# Altium PCB Basic_flex_IMU.PcbDoc
Units mm, origin at the board's own origin, x right, y up, seen from the top; angles counter-clockwise.
Board outline 23.11 x 11.56 mm, 2 copper layers (Top Layer, Bottom Layer); 12 components, 17 nets, 69 pads, 18 vias.
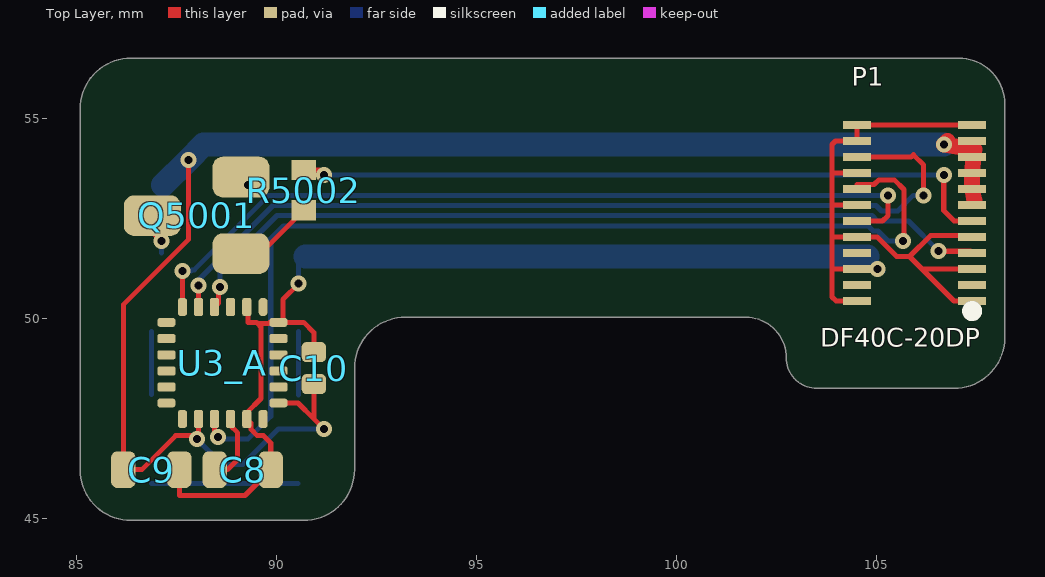
[diagram p0: Top Layer view]
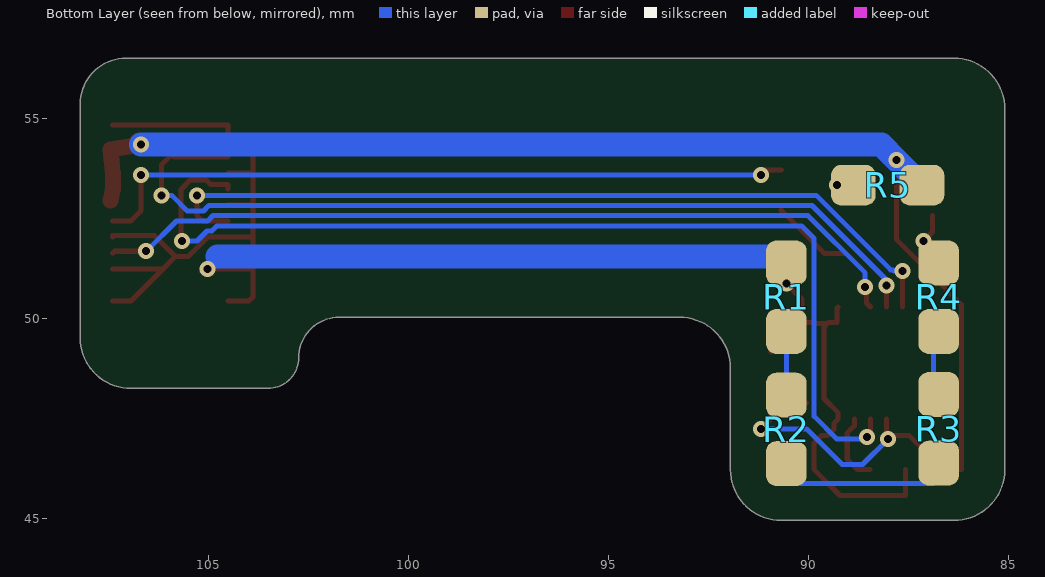
[diagram p1: Bottom Layer view, seen from below]
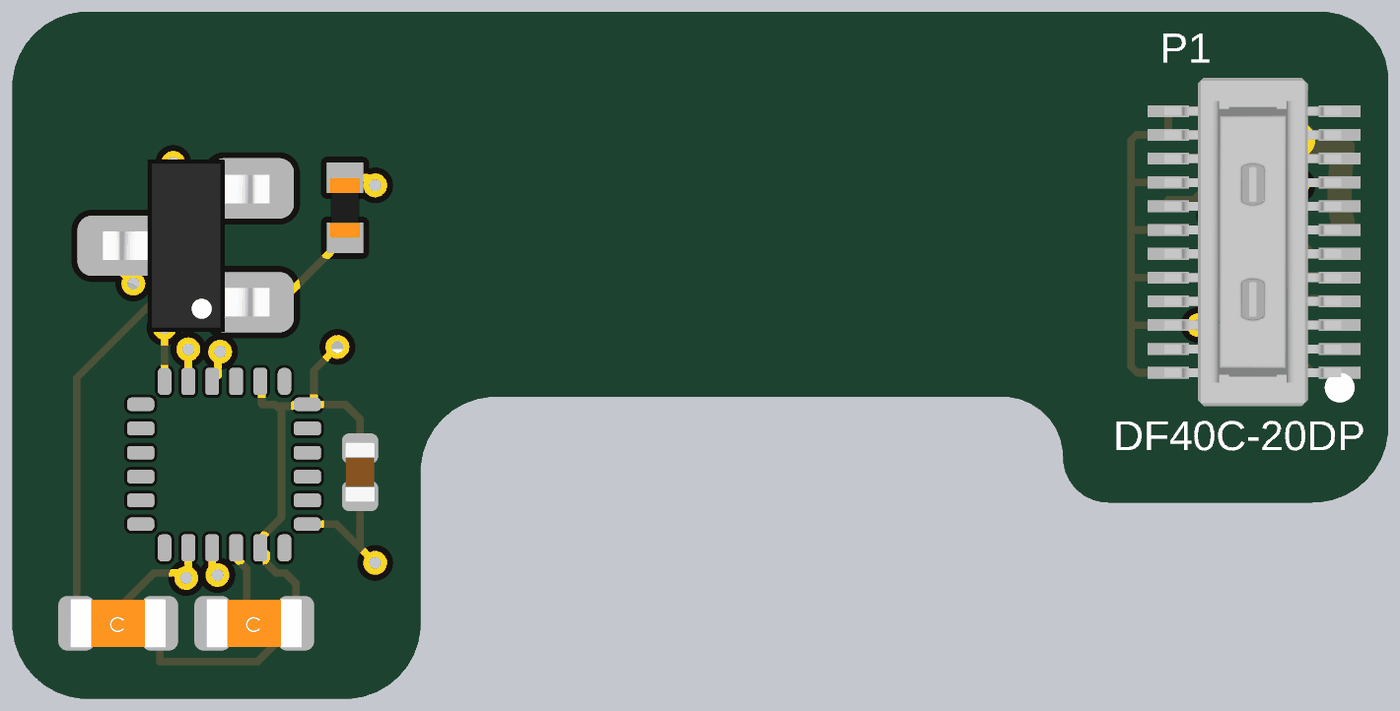
[diagram p2: 3D render of the assembled board from above, using the file's embedded part models]
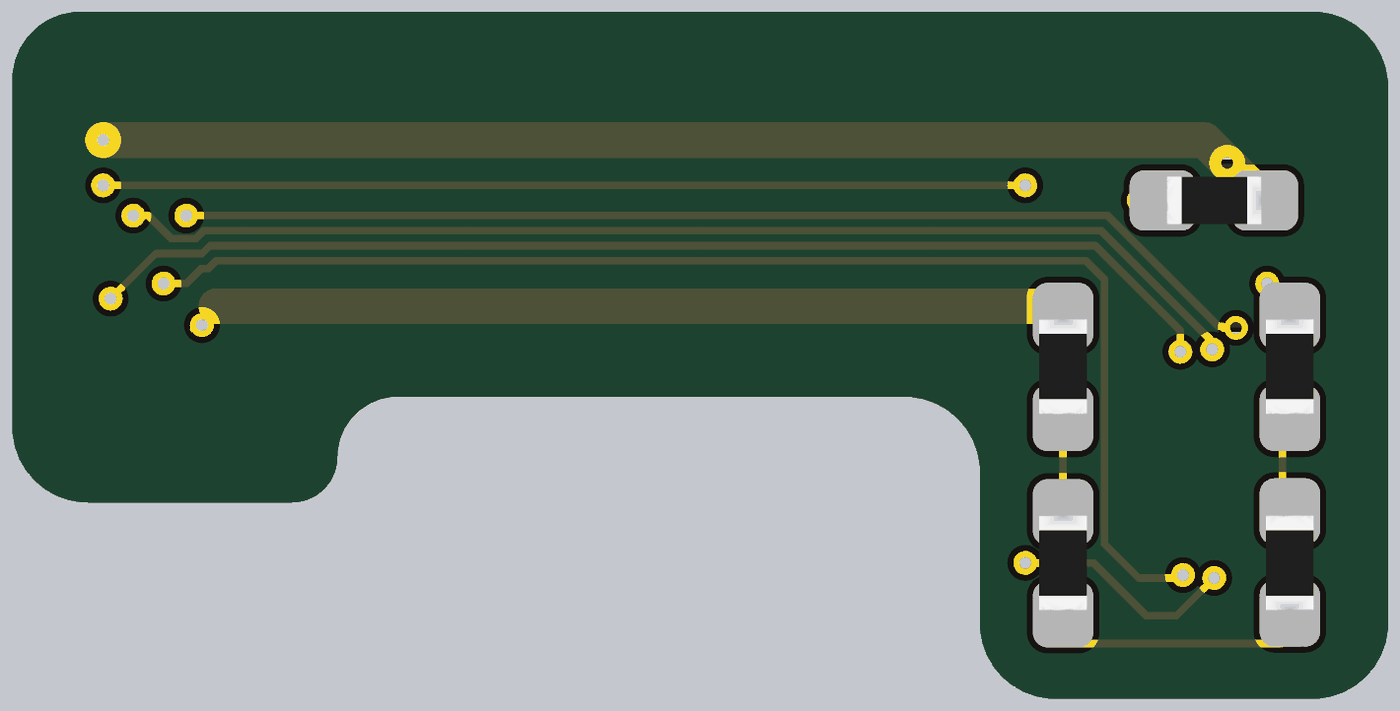
[diagram p3: 3D render of the assembled board from below, using the file's embedded part models]

## Layer stack, top to bottom
Top Solder: solder mask 0.0102, Solder Resist, Dk 3.5
Top Layer: signal copper 0.0356
Dielectric 1: dielectric 0.32, FR-4, Dk 4.8
Bottom Layer: signal copper 0.0356
Bottom Solder: solder mask 0.0102, Solder Resist, Dk 3.5

## Board outline
85.09,46.228 ccw(c86.36,46.228) 86.36,44.958 90.678,44.958 ccw(c90.678,46.228) 91.948,46.228 91.948,48.768 cw(c93.218,48.768) 93.218,50.038 101.727,50.038 cw(c101.727,49.022) 102.743,49.022 ccw(c103.505,49.022) 103.505,48.26 106.934,48.26 ccw(c106.934,49.53) 108.204,49.53 108.204,55.372 ccw(c107.061,55.372) 107.061,56.515 86.36,56.515 ccw(c86.36,55.245) 85.09,55.245

## Design rules (kind name [scope] priority, off if disabled: settings)
Clearance [All] p1: gap=0.125
PolygonConnect [All] p1: connectstyle=Relief reliefconductorwidth=0.254 reliefentries=4 polygonreliefangle="90 Angle" airgapwidth=0.254
RoutingVias [All] p1: holewidth=0.2 width=0.2 viastyle="Through Hole" minholewidth=0.2 minwidth=0.4 maxholewidth=0.711 maxwidth=1.27
SolderMaskExpansion [All] p1: expansion=0.102
Width [All] p1: maxlimit=0.6 minlimit=0.127 preferedwidth=0.127
30 further rules are at their usual default settings.

## Components (designator, comment, footprint, x,y, rotation, side; value= is the part's Value field where it differs from the comment)
C8 "2u2" 0603-CAP 89.154,46.228 r0 top
C9 "2u2" 0603-CAP 86.868,46.228 r0 top
C10 "0u1" 0402-CAP 90.932,48.768 r90 top
P1 "DF40C-20DP" DF40C-20-DP 105.946,52.643 r180 top locked
Q5001 "MMBT3906*SMD" SOT23-BEC 88.011,52.578 r90 top
R1 "Resistor" R0603 90.551,50.546 r270 bottom
R2 "Resistor" R0603 90.551,47.244 r270 bottom
R3 "Resistor" R0603 86.741,47.244 r90 bottom
R4 "Resistor" R0603 86.741,50.546 r270 bottom
R5 "Resistor" R0603 88.011,53.34 r0 bottom
R5002 "1K8" 0402-RES 90.678,53.213 r90 top
U3_A "MPU-9250" MPU-9250 88.646,48.895 r0 top

## Footprints (in the part's own frame and the unit in brackets; to place one, negate y for a bottom-side part, rotate by r counter-clockwise, add the part's x,y. Pads: shape width x height; smd on the part's side, far side on the other; paste and mask are expansions set on the pad)
0402-CAP [mil]
  rrect50% 20x24 smd mask+0: P$1(-15.75,0) P$2(15.75,0)
  body extent -20,-10 20,10, height 20
0402-RES [mil] "0402-RES"
  rect 20x24 smd: P$1(-19.69,0) P$2(20,0)
  body extent -20,-10 20,10, height 20
0603-CAP [mil] "0603-CAP"
  rrect50% 24x36 smd mask+0: P$1(-27.56,0) P$2(27.56,0)
  body extent -31,-16 31,16, height 34
DF40C-20-DP [mm]
  rect 0.7x0.2 smd mask+0: 1(-1.444,1.8) 2(1.436,1.8) 3(-1.444,1.4) 4(1.436,1.4) 5(-1.444,1) 6(1.436,1) 7(-1.444,0.6) 8(1.436,0.6) 9(-1.444,0.2) 10(1.436,0.2) 11(-1.444,-0.2) 12(1.436,-0.2) 13(-1.444,-0.6) 14(1.436,-0.6) 15(-1.444,-1) 16(1.436,-1) 17(-1.444,-1.4) 18(1.436,-1.4) 19(-1.444,-1.8) 20(1.436,-1.8) 21(-1.444,-2.2) 22(1.436,-2.2) 23(-1.444,2.2) 24(1.436,2.2)
  silkscreen extent -1.57,2.33 -1.32,2.57, body extent -1.47,-2.76 1.5,2.76, height 1.09
MPU-9250 [mm] "MPU-9250"
  rrect70% 0.457x0.229 smd mask+0.05: 1(-1.4,1.016) 6(-1.4,-1) 13(1.4,-1) 18(1.4,1.016)
  rrect50% 0.457x0.229 smd mask+0.05: 2(-1.4,0.61) 3(-1.4,0.203) 4(-1.4,-0.2) 5(-1.4,-0.6) 14(1.4,-0.6) 15(1.4,-0.2) 16(1.4,0.203) 17(1.4,0.61)
  rrect70% 0.229x0.457 smd mask+0.05: 7(-1,-1.4) 12(1.016,-1.4) 24(-1,1.4)
  rrect50% 0.229x0.457 smd mask+0.05: 8(-0.6,-1.4) 9(-0.2,-1.4) 10(0.203,-1.4) 11(0.61,-1.4) 20(0.61,1.4) 21(0.203,1.4) 22(-0.2,1.4) 23(-0.6,1.4)
  rrect90% 0.229x0.457 smd mask+0.05: 19(1.016,1.4)
R0603 [mil]
  rrect50% 44x40 smd: 1(-33.46,0) 2(34,0)
  body extent -31,-16 32,16, height 18
SOT23-BEC [mil] "SOT23-BEC"
  rrect50% 40x56 smd: B(-37.4,-43.31) C(0,44) E(38,-43.31)
  body extent -57,-55 57,55, height 51

## Part data
C8 C9: library part CAPACITOR-0603, "Capacitor, 2.2uF, 16V, 10%, X6S, 0603, Ceramic"
C10: library part CAPACITOR-0402, "Capacitor, 0.1uF, 16V, Y5V, 0402, Ceramic"
P1: "Connector, HDR, 20Pos, 0.4mm, SMD, GOLD"
Q5001: "TRANSISTOR SWITCHING PNP SOT-23"
R1 R2 R3 R4 R5: "RES SMD 5.1 OHM 5% 1/4W 0603"
R5002: library part RESISTOR0402-RES, "RES 1.8K OHM 1/16W 1% 0402"
U3_A: library part MPU-6500

## Via types
v1: diameter 0.4, hole 0.2, Top Layer to Bottom Layer, 18 vias

## Nets (pads, with @x,y where several pads share a name; then routed paths per layer and width w, separated by ;. In a path a pad name is that pad's centre, name@x,y a point inside that pad or via, vN(x,y) a via of type N, cw(c..) or ccw(c..) an arc to the next point about the centre after c; other vN are vias at no path point)
+3V3: C9.P$1 C10.P$1 P1.11 P1.13 P1.15 P1.17 P1.19 R5.1 U3_A.8 U3_A.13 | length 39.3
  Top Layer w0.127: v1(87.793,53.972) 87.793,51.979 86.168,50.354 C9.P$1 86.629,46.228 87.479,47.078 v1@87.949,47.078 ; v1(88.011,46.99) 88.046,47.025 U3_A.8 ; U3_A.13 90.535,47.895 90.932,47.498 ; C10.P$1 90.932,47.498 ; v1(91.186,47.244) 90.932,47.498
  Top Layer w0.4: v1@106.767,54.443 v1(106.68,54.356) 107.442,54.229 P1.15 P1.13 107.442,52.959
  Bottom Layer w0.127: v1(88.011,46.99) 88.646,46.355 89.154,46.355 90.043,47.244 v1(91.186,47.244)
  Bottom Layer w0.6: R5.1 v1(87.793,53.972) 88.177,54.356 v1(106.68,54.356)
A\C\C\E\L\_\M\A\G\_\C\S\: P1.2
B\A\R\O\_\C\S\: P1.1
G\Y\R\O\_\C\S\: P1.6
GND: C8.P$2 C9.P$2 C10.P$2 P1.3 P1.4 P1.7 P1.8 P1.12 P1.16 P1.20 P1.21 P1.22 P1.23 P1.24 R1.1 U3_A.11 U3_A.18 U3_A.20 | length 44.4
  Top Layer w0.127: C9.P$2 87.568,45.582 89.208,45.582 C8.P$2 89.854,46.897 89.673,47.078 89.516,47.078 89.359,47.235 89.359,47.391 U3_A.11 89.256,47.651 89.61,48.006 89.61,49.797 89.53,49.878 ; U3_A.20 89.281,50.27 89.281,49.911 89.497,49.911 89.53,49.878 ; U3_A.18@90.157,50 90.157,50.482 v1(90.551,50.876) ; C10.P$2 90.932,49.657 90.678,49.911 U3_A.18 89.827,49.911 89.794,49.878 89.53,49.878 ; 103.897,52.843 P1.12 ; 103.913,52.043 P1.8 105.015,52.043 105.503,51.554 105.825,51.554 ; 103.948,51.243 P1.4 v1(105.019,51.243) ; 103.964,53.643 P1.16 ; P1.24 103.989,50.443 103.886,50.546 103.886,54.356 103.973,54.443 P1.20 P1.22 P1.21 ; P1.23 106.936,50.443 106.136,51.243 ; P1.3 106.136,51.243 ; P1.7 107.39,52.078 106.348,52.078 105.825,51.554 ; 105.825,51.554 106.136,51.243
  Bottom Layer w0.127: v1(90.551,50.876) R1.1 R1.1@90.717,51.562 ; 104.775,51.562 105.156,51.181 105.081,51.181 v1(105.019,51.243)
  Bottom Layer w0.6: R1.1@90.717,51.562 104.775,51.562
IMU_MISO: P1.14 U3_A.9 | length 25.3
  Top Layer w0.127: U3_A.9 88.446,47.129 v1(88.536,47.039) ; P1.14 104.51,53.354 104.938,53.354 105.058,53.475 105.444,53.475 105.685,53.234 105.685,51.964 v1(105.664,51.943)
  Bottom Layer w0.127: v1(88.536,47.039) 88.585,46.99 89.281,46.99 89.854,47.563 89.854,52.008 90.17,52.324 104.783,52.324 104.913,52.193 105.033,52.193 105.283,51.943 v1(105.664,51.943)
IMU_MOSI: P1.10 U3_A.24 | length 20.7
  Top Layer w0.127: U3_A.24 v1(87.646,51.197) ; P1.10 105.148,52.443 105.283,52.578 v1(105.283,53.086)
  Bottom Layer w0.127: v1(87.646,51.197) 87.859,51.197 87.885,51.224 87.943,51.224 89.805,53.086 v1(105.283,53.086)
IMU_SCK: P1.18 U3_A.23 | length 22.3
  Top Layer w0.127: U3_A.23 v1(88.046,50.835) ; P1.18 105.859,54.043 105.918,54.102 106.172,53.848 v1(106.172,53.086)
  Bottom Layer w0.127: v1(88.046,50.835) 88.046,50.97 89.908,52.832 104.988,52.832 105.122,52.697 105.529,52.697 105.918,53.086 v1(106.172,53.086)
IMU_TEMPERATURE_CONTROL: P1.9 R5002.P$2 | length 17.8
  Top Layer w0.127: R5002.P$2 91.059,53.721 v1(91.186,53.594) ; v1(106.68,53.594) 106.68,52.705 106.942,52.443 P1.9
  Bottom Layer w0.127: v1(91.186,53.594) v1(106.68,53.594)
M\P\U\_\C\S\: P1.5 U3_A.22 | length 20.7
  Top Layer w0.127: U3_A.22 88.546,50.395 88.546,50.761 v1(88.58,50.795) ; v1(106.553,51.689) 107.344,51.689 P1.5
  Bottom Layer w0.127: v1(88.58,50.795) 88.58,51.148 90.012,52.58 104.883,52.58 105.018,52.445 105.797,52.445 v1(106.553,51.689)
NetQ5001_B: Q5001.B R5002.P$1 | length 2
  Top Layer w0.127: Q5001.B 89.593,51.628 R5002.P$1
NetQ5001_C: Q5001.C R4.1 | length 1
  Top Layer w0.127: Q5001.C 86.893,52.172 v1(87.122,51.943)
  Bottom Layer w0.127: R4.1@87.122,51.65 v1(87.122,51.943)
NetQ5001_E: Q5001.E R5.2 | length 0.4
  Bottom Layer w0.127: R5.2 v1(89.281,53.34)
NetR1_2: R1.2 R2.1 | length 1.6
  Bottom Layer w0.127: R2.1 R1.2
NetR2_2: R2.2 R3.1 | length 3.7
  Bottom Layer w0.127: R3.1@86.868,45.886 R2.2@90.537,45.886
NetR3_2: R3.2 R4.2 | length 1.6
  Bottom Layer w0.127: R3.2@86.868,48.108 R4.2@86.868,49.682
REGOUT: C8.P$1 U3_A.10 | length 1.8
  Top Layer w0.127: C8.P$1 88.773,46.228 89.027,46.482 89.027,47.148 88.849,47.325 U3_A.10
pads on no net: U3_A.1 U3_A.2 U3_A.3 U3_A.4 U3_A.5 U3_A.6 U3_A.7 U3_A.12 U3_A.14 U3_A.15 U3_A.16 U3_A.17 U3_A.19 U3_A.21

## Silkscreen, mask and mechanical layers (free items; w line width, h text height)
Mechanical 1:
  lines w0.254: 85.09,46.228 ccw(c86.36,46.228) 86.36,44.958 90.678,44.958 ccw(c90.678,46.228) 91.948,46.228 91.948,48.768 cw(c93.218,48.768) 93.218,50.038 101.727,50.038 cw(c101.727,49.022) 102.743,49.022 ccw(c103.505,49.022) 103.505,48.26 106.934,48.26 ccw(c106.934,49.53) 108.204,49.53 108.204,54.991 108.204,55.372 ccw(c107.061,55.372) 107.061,56.515 86.36,56.515 ccw(c86.36,55.245) 85.09,55.245 85.09,46.228

## Text inside footprints (layer, text, board x,y; h text height)
U3_A: Mechanical 16 "X" at 88.971,48.37 h0.26; Mechanical 16 "Z" at 87.796,47.97 h0.26; Mechanical 16 "Y" at 87.896,49.52 h0.26